# Altium PCB TEENSY 3-4.PcbDoc
Units mil, origin at the board's own origin, x right, y up, seen from the top; angles counter-clockwise.
Board outline 4500 x 5000 mil, 2 copper layers (Top Layer, Bottom Layer); 13 components, 27 nets, 152 pads, 0 vias.
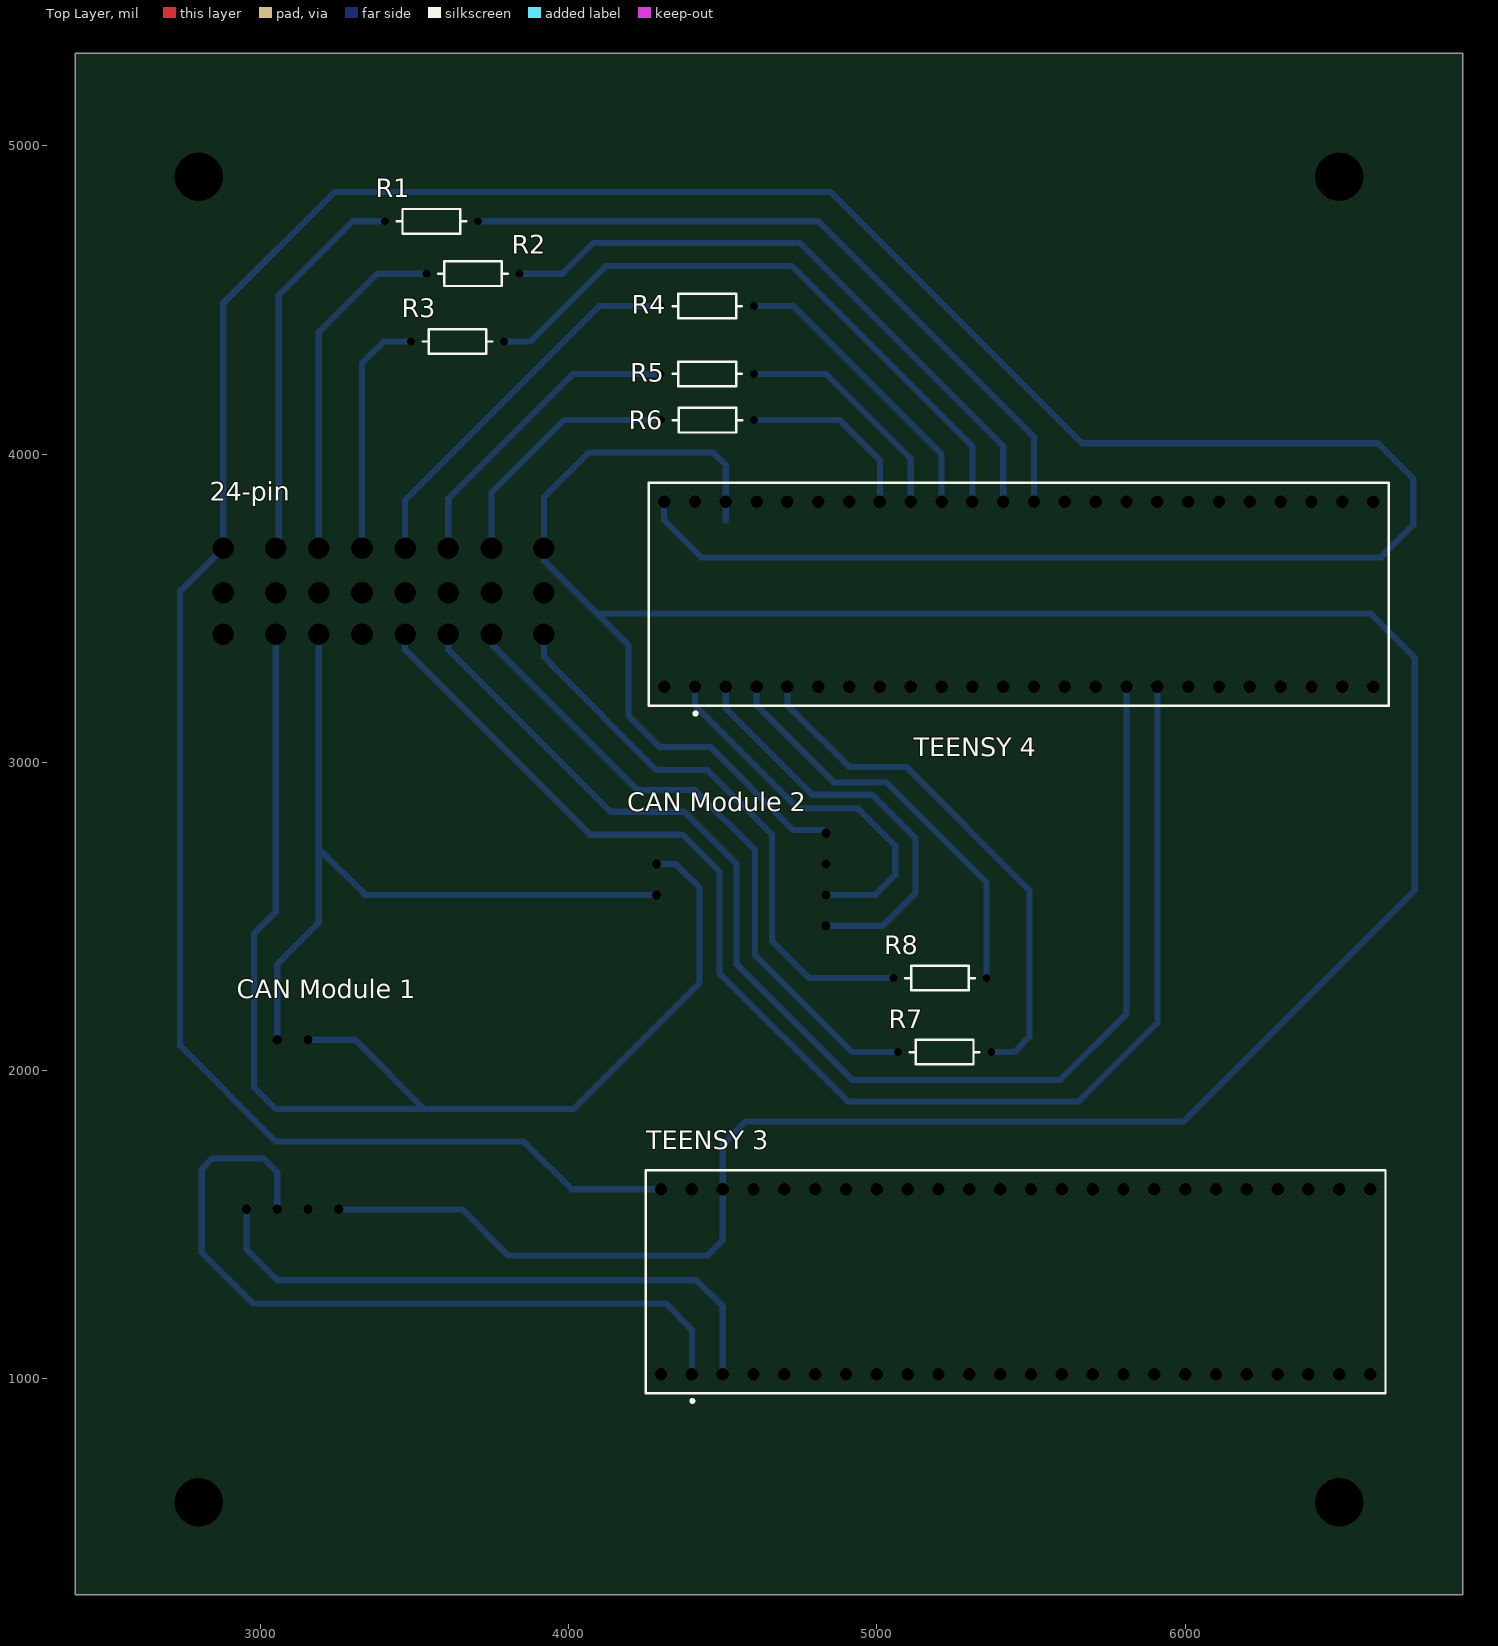
[diagram p0: Top Layer view]
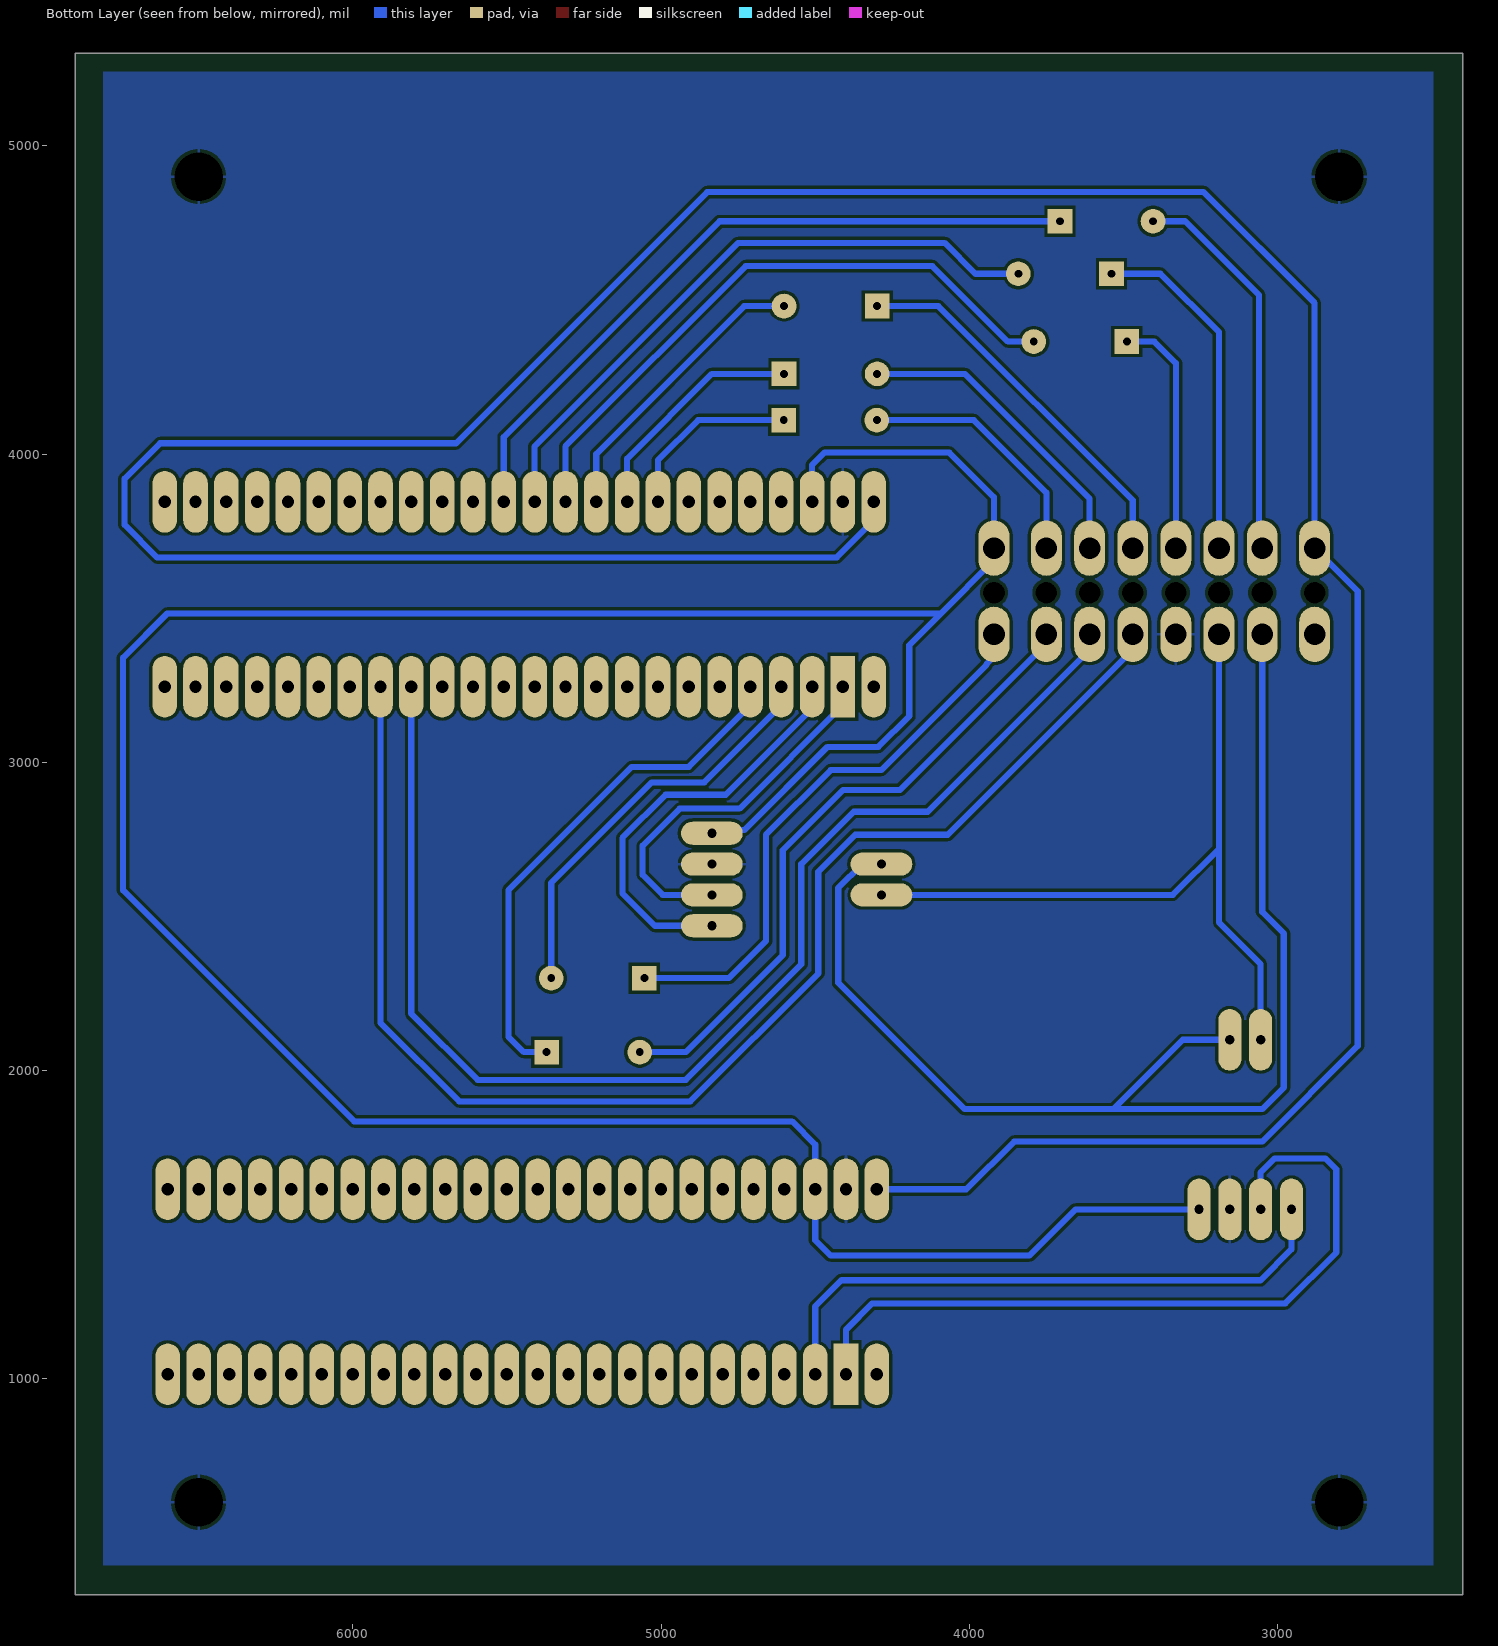
[diagram p1: Bottom Layer view, seen from below]
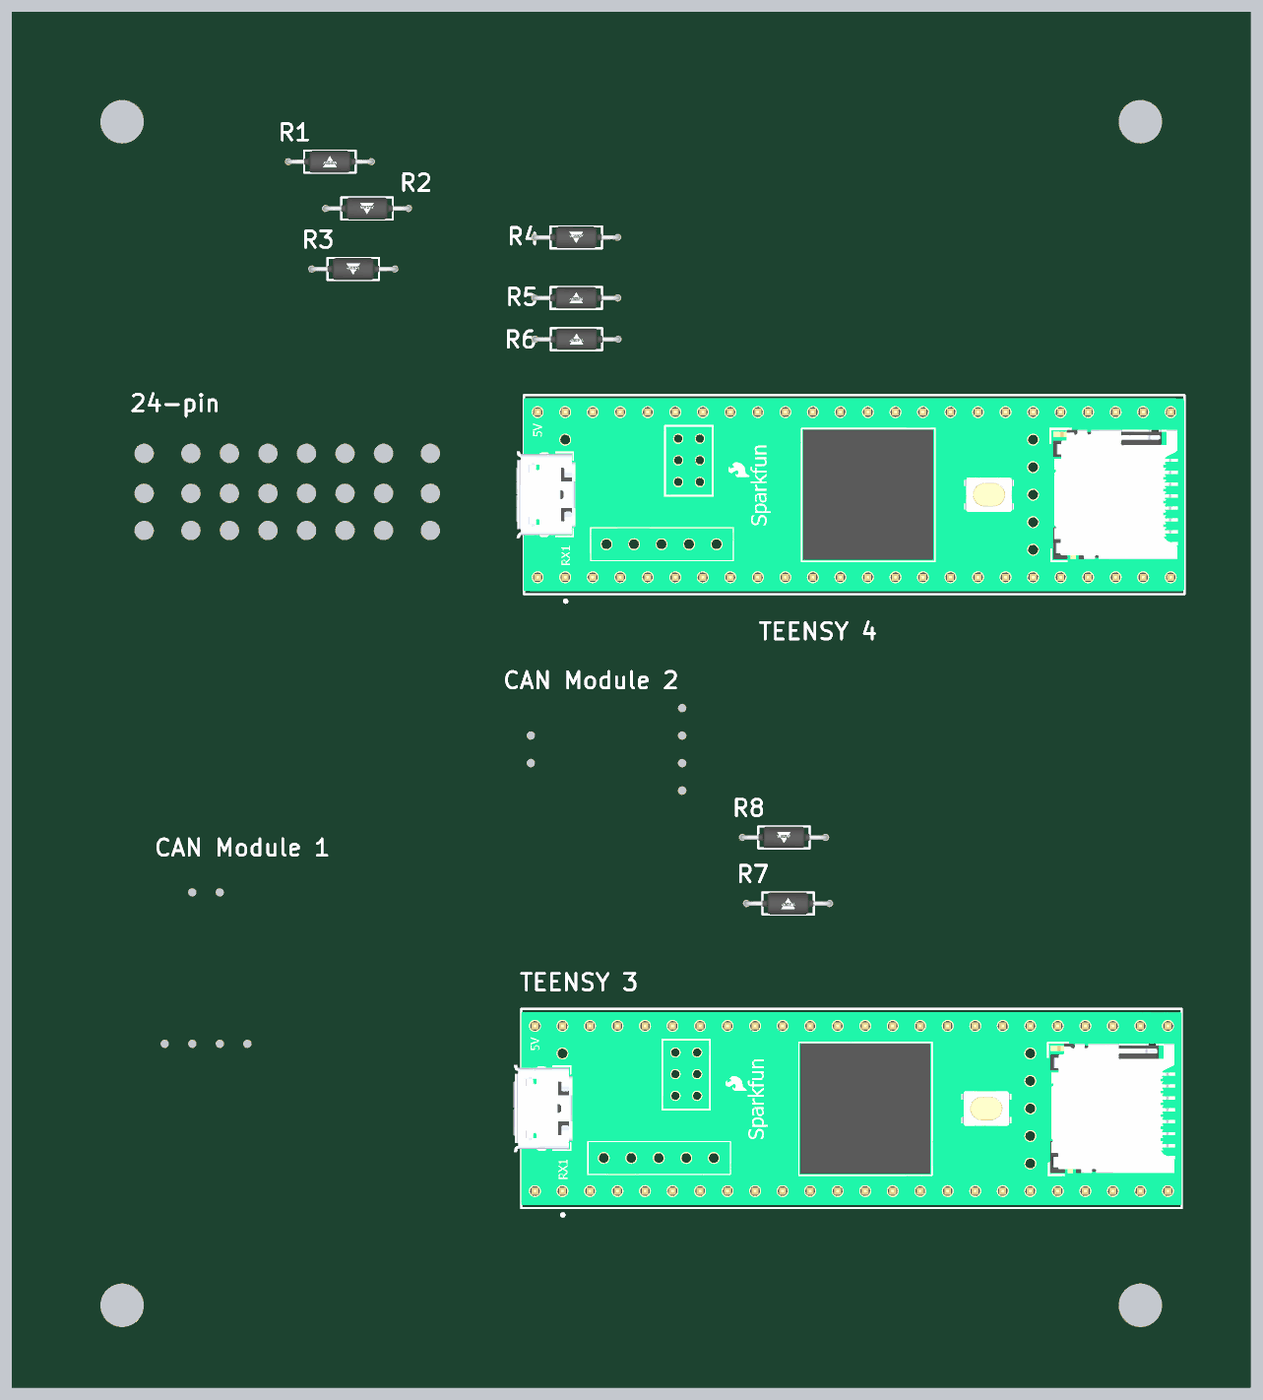
[diagram p2: 3D render of the assembled board from above, using the file's embedded part models]

## Layer stack, top to bottom
Top Solder: solder mask 0.4, Solder Resist, Dk 3.5
Top Layer: signal copper 1.4
Dielectric 1: dielectric 12.6, FR-4, Dk 4.8
Bottom Layer: signal copper 1.4
Bottom Solder: solder mask 0.4, Solder Resist, Dk 3.5

## Board outline
6900,300 2400,300 2400,5300 6900,5300

## Design rules (kind name [scope] priority, off if disabled: settings)
Clearance [All] p1: gap=10 ignorepadtopadclearanceinfootprint=FALSE
PolygonConnect [All] p1: connectstyle=Relief reliefconductorwidth=10 reliefentries=4 polygonreliefangle="90 Angle" airgapwidth=10
RoutingVias [All] p1: holewidth=28 width=50 viastyle="Through Hole" minholewidth=28 minwidth=50 maxholewidth=28 maxwidth=50
SolderMaskExpansion [All] p1: expansion=4 istentingtop=FALSE
Width [All] p1: maxlimit=50 minlimit=20 preferedwidth=20 minimp=50.000000 maximp=50.000000 favimp=50.000000
30 further rules are at their usual default settings.

## Classes and differential pairs
component class "TEENSY 3-4": 24-pin "CAN Module 2" R1 R2 R3 R4 R5 R6 R7 R8 "TEENSY 3" "TEENSY 4"

## Components (designator, comment, footprint, x,y, rotation, side; value= is the part's Value field where it differs from the comment)
24-pin "DJ7242" DJ7242-Footprint-1 2880,3340 r0 top
"CAN Module 1" "CAN Module" "CAN Module-Footprint-1" 3255,1550 r90 top
"CAN Module 2" "CAN Module" "CAN Module-Footprint-1" 4835,2770 r180 top
R1 "CMF5073K200FHEB" FP-CMF50-0 3555,4755 r180 top
R2 "CMF5073K200FHEB" FP-CMF50-0 3690,4585 r0 top
R3 "CMF5073K200FHEB" FP-CMF50-0 3640,4365 r0 top
R4 "CMF5073K200FHEB" FP-CMF50-0 4450,4480 r0 top
R5 "CMF5073K200FHEB" FP-CMF50-0 4450,4260 r180 top
R6 "CMF5073K200FHEB" FP-CMF50-0 4450.98,4110 r180 top
R7 "CMF5073K200FHEB" FP-CMF50-0 5220,2060 r180 top
R8 "CMF5073K200FHEB" FP-CMF50-0 5205,2300 r0 top
"TEENSY 3" "TEENSY 4.1" FP-DEV-16996-MFG 5450,1315 r0 top
"TEENSY 4" "TEENSY 4.1" FP-DEV-16996-MFG 5460,3545 r0 top

## Footprints (in the part's own frame and the unit in brackets; to place one, negate y for a bottom-side part, rotate by r counter-clockwise, add the part's x,y. Pads: shape width x height; smd on the part's side, far side on the other; paste and mask are expansions set on the pad)
"CAN Module-Footprint-1" [mil]
  round 0 / inner round 60 / far side oval 200x75 hole 30: 1(0,300) 2(0,200) 3(0,100) 4(0,0) 5(550,200) 6(550,100)
DJ7242-Footprint-1 [mil]
  round 0 / inner round 60 / far side oval 100x180 hole 70: 1(0,355) 2(170,355) 3(310,355) 4(450,355) 5(590,355) 6(730,355) 7(870,355) 8(1040,355) 17(0,75) 18(170,75) 19(310,75) 20(450,75) 21(590,75) 22(730,75) 23(870,75) 24(1040,75)
  round 0 hole 70: 9(0,210) 10(170,210) 11(310,210) 12(450,210)
  round 0 / inner oval 100x200 / far side round 0 hole 70: 13(590,210) 14(730,210) 15(870,210) 16(1040,210)
FP-CMF50-0 [mm]
  rect 0x0 / inner rect 1.15x1.15 / far side rect 2.032x2.032 hole 0.65 paste-2539.97 mask+0: 1(-3.835,0)
  round 0 / inner round 1.15 / far side round 2.032 hole 0.65 paste-2539.97 mask+0: 2(3.835,0)
  silkscreen extent -2.86,-1.01 2.86,1.01, body extent -4.51,-1.11 4.51,1.11, height 0.25
FP-DEV-16996-MFG [mm]
  rect 0x0 / inner rect 1.57x1.57 / far side rect 2.032x5.08 hole 1.02 paste-2539.97 mask+0: 0(-26.67,-7.62)
  round 0 / inner round 1.57 / far side oval 2.032x5.08 hole 1.02 paste-2539.97 mask+0: 1(-24.13,-7.62) 2(-21.59,-7.62) 3(-19.05,-7.62) 4(-16.51,-7.62) 5(-13.97,-7.62) 6(-11.43,-7.62) 7(-8.89,-7.62) 8(-6.35,-7.62) 9(-3.81,-7.62) 10(-1.27,-7.62) 11(1.27,-7.62) 12(3.81,-7.62) 13(3.81,7.62) 14(1.27,7.62) 15(-1.27,7.62) 16(-3.81,7.62) 17(-6.35,7.62) 18(-8.89,7.62) 19(-11.43,7.62) 20(-13.97,7.62) 21(-16.51,7.62) 22(-19.05,7.62) 23(-21.59,7.62) 24(8.89,-7.62) 25(11.43,-7.62) 26(13.97,-7.62) 27(16.51,-7.62) 28(19.05,-7.62) 29(21.59,-7.62) 30(24.13,-7.62) 31(26.67,-7.62) 32(29.21,-7.62) 33(29.21,7.62) 34(26.67,7.62) 35(24.13,7.62) 36(21.59,7.62) 37(19.05,7.62) 38(16.51,7.62) 39(13.97,7.62) 40(11.43,7.62) 41(8.89,7.62) 42(-29.21,7.62) 43(-26.67,7.62) 44(-24.13,7.62) 45(6.35,7.62) 46(-29.21,-7.62) 47(6.35,-7.62)
  silkscreen extent -30.48,-9.94 30.48,9.19, body extent -30.58,-9.29 30.58,9.29, height 0.25

## Part data
24-pin: library part CMP-00030-00002-5, "24-pin connector"
"CAN Module 1" "CAN Module 2": library part CMP-00030-00003-1, "CAN waveshare"
R1 R2 R3 R4 R5 R6 R7 R8: library part CMP-00030-44386654-1, "CMF5073K200FHEB Res Metal Film 73.2K Ohm 1% 0.125W(1/8W) ±50ppm/°C Epoxy AXL T/R", Case/Package=Axial, Max Operating Temperature=175°C, Max Power Dissipation=250mW, Min Operating Temperature=-55°C, Power Rating=125mW, Resistance=73.2kΩ, Temperature Coefficient=50ppm/°C, Tolerance=1%, Voltage Rating=200V, Composition="Metal Film", Diameter=1.65mm, Features="Flame Retardant Coating, Moisture Resistant", Lead Free="Lead Free", Length=3.81mm, Mount="Through Hole", NexarPartId=44386654, Number of Terminations=2, Packaging="Cut Tape", RoHS=Compliant, Schedule B="8533210090, 8533210090", Termination=Axial, Voltage Rating (DC)=200V, Width=1.65mm
"TEENSY 3" "TEENSY 4": library part CMP-157412-000001-1, "TEENSY 4.1 (HEADERS)"

## Free pads (board coordinates)
  round 40 / inner round 0 / far side round 40 hole 157.48: 2(2800,600) 2(2800,4900) 2(6500,600) 2(6500,4900)

## Nets (pads, with @x,y where several pads share a name; then routed paths per layer and width w, separated by ;. In a path a pad name is that pad's centre, name@x,y a point inside that pad or via, vN(x,y) a via of type N, cw(c..) or ccw(c..) an arc to the next point about the centre after c; other vN are vias at no path point)
3.3V: 24-pin.8 "CAN Module 1.4" "CAN Module 2.4" "TEENSY 3.44" "TEENSY 4.44" | length 10159
  Bottom Layer w20: 3255,1550 3655,1550 3805,1400 4450,1400 4500,1450 4500,1615 4500,1760 4575,1835 5995,1835 6745,2585 6745,3340 6602.5,3482.5 4092.5,3482.5 ; 4510,3785 4510,3965 4470,4005 4065,4005 3920,3860 24-pin.8 3920,3655 4092.5,3482.5 ; 4835,2770 4824.48,2780.52 4729.48,2780.52 4460,3050 4295,3050 4195,3150 4195,3380 4092.5,3482.5
"CAN RX 1": "CAN Module 1.2" "TEENSY 3.0" | length 2506.7
  Bottom Layer w20: 3055,1550 3055,1670 3010,1715 2845,1715 2810,1680 2810,1410 2975,1245 4315,1245 4400,1160 4400,1015
"CAN RX 2": "CAN Module 2.2" "TEENSY 4.0" | length 1245.4
  Bottom Layer w20: 4410,3245 4410,3185 4745,2850 4940,2850 5060,2730 5060,2635 4995,2570 4835,2570
"CAN TX 1": "CAN Module 1.1" "TEENSY 3.1" | length 1971.6
  Bottom Layer w20: 2955,1550 2955,1420 3055,1320 4415,1320 4500,1235 4500,1015
"CAN TX 2": "CAN Module 2.1" "TEENSY 4.1" | length 1372.5
  Bottom Layer w20: 4510,3245 4510,3175 4790,2895 4985,2895 5125,2755 5125,2575 5020,2470 4835,2470
CANH: 24-pin.19 "CAN Module 1.5" "CAN Module 2.5" | length 2528.1
  Bottom Layer w20: 3055,2100 3055,2345 3190,2480 3190,2720 ; 24-pin.19 3190,2720 ; 4285,2570 3340,2570 3190,2720
CANL: 24-pin.18 "CAN Module 1.6" "CAN Module 2.6" | length 4093.1
  Bottom Layer w20: 24-pin.18 3050,2515 2980,2445 2980,1945 3050,1875 3532.5,1875 ; 3155,2100 3307.5,2100 3532.5,1875 ; 4285,2670 4347.5,2670 4425,2592.5 4425,2285 4015,1875 3532.5,1875
GND: 24-pin.20 "CAN Module 1.3" "CAN Module 2.3" "TEENSY 3.43" "TEENSY 4.43" pad.2
"HRN RD": 24-pin.24 R8.1 | length 1841.9
  Bottom Layer w20: 24-pin.24 3920,3343.35 3944.07,3319.28 3944.07,3315.93 4285,2975 4450,2975 4660,2765 4660,2420 4780,2300 R8.1
"HRN WRT": 24-pin.23 R7.2 | length 2097
  Bottom Layer w20: 24-pin.23 3750,3385 4225,2910 4410,2910 4605,2715 4605,2375 4920,2060 R7.2
"LED1 B": 24-pin.4 R3.1 | length 788
  Bottom Layer w20: 24-pin.4 3330,4295 3400,4365 R3.1
"LED1 G": 24-pin.3 R2.1 | length 1127.7
  Bottom Layer w20: 24-pin.3 3190,4395 3380,4585 R2.1
"LED1 R": 24-pin.2 R1.2 | length 1267.6
  Bottom Layer w20: 24-pin.2 3060,3705 3060,4515 3300,4755 R1.2
"LED2 B": 24-pin.7 R6.2 | length 827.3
  Bottom Layer w20: 24-pin.7 3750,3875 3985,4110 R6.2
"LED2 G": 24-pin.6 R5.2 | length 1016.8
  Bottom Layer w20: 24-pin.6 3610,3855 4015,4260 R5.2
"LED2 R": 24-pin.5 R4.1 | length 1245
  Bottom Layer w20: 24-pin.5 3470,3850 4100,4480 R4.1
NetR1_1: "TEENSY 4.14" R1.1 | length 2304
  Bottom Layer w20: R1.1 4810,4755 5510,4055 5510,3845
NetR2_2: "TEENSY 4.15" R2.2 | length 2063.8
  Bottom Layer w20: R2.2 3980,4585 4080,4685 4750,4685 5410,4025 5410,3845
NetR3_2: "TEENSY 4.16" R3.2 | length 2042.8
  Bottom Layer w20: R3.2 3875,4365 4120,4610 4725,4610 5310,4025 5310,3845
NetR4_2: "TEENSY 4.17" R4.2 | length 962.8
  Bottom Layer w20: R4.2 4730,4480 5210,4000 5210,3845
NetR5_1: "TEENSY 4.18" R5.1 | length 762.9
  Bottom Layer w20: R5.1 4835,4260 5110,3985 5110,3845
NetR6_1: "TEENSY 4.19" R6.1 | length 596.9
  Bottom Layer w20: R6.1 4880,4110 5010,3980 5010,3845
NetR7_1: "TEENSY 4.3" R7.1 | length 1713.3
  Bottom Layer w20: 4710,3245 4710,3185 4910,2985 5095,2985 5495,2585 5495,2110 5445,2060 R7.1
NetR8_2: "TEENSY 4.2" R8.2 | length 1353.6
  Bottom Layer w20: 4610,3245 4610,3185 4860,2935 5030,2935 5355.98,2609.02 R8.2
SCL: 24-pin.22 "TEENSY 4.24" | length 4167.3
  Bottom Layer w20: 24-pin.22 3610,3365 4135,2840 4375,2840 4545,2670 4545,2345 4920,1970 5595,1970 5810,2185 5810,3245
SDA: 24-pin.21 "TEENSY 4.25" | length 4485.8
  Bottom Layer w20: 24-pin.21 3470,3365 4070,2765 4370,2765 4490,2645 4490,2315 4905,1900 5655,1900 5910,2155 5910,3245
VIN: 24-pin.1 "TEENSY 3.42" "TEENSY 4.42" | length 11348.1
  Bottom Layer w20: 4300,1615 4010,1615 3855,1770 3050,1770 2740,2080 2740,3555 24-pin.1 2880,4490 3240,4850 4850,4850 5665,4035 6625,4035 6740,3920 6740,3770 6635,3665 4430,3665 4310,3785 4310,3845
pads on no net: 24-pin.9 24-pin.10 24-pin.11 24-pin.12 24-pin.13 24-pin.14 24-pin.15 24-pin.16 24-pin.17 "TEENSY 3.2" "TEENSY 3.3" "TEENSY 3.4" "TEENSY 3.5" "TEENSY 3.6" "TEENSY 3.7" "TEENSY 3.8" "TEENSY 3.9" "TEENSY 3.10" "TEENSY 3.11" "TEENSY 3.12" "TEENSY 3.13" "TEENSY 3.14" "TEENSY 3.15" "TEENSY 3.16" "TEENSY 3.17" "TEENSY 3.18" "TEENSY 3.19" "TEENSY 3.20" "TEENSY 3.21" "TEENSY 3.22" "TEENSY 3.23" "TEENSY 3.24" "TEENSY 3.25" "TEENSY 3.26" "TEENSY 3.27" "TEENSY 3.28" "TEENSY 3.29" "TEENSY 3.30" "TEENSY 3.31" "TEENSY 3.32" "TEENSY 3.33" "TEENSY 3.34" "TEENSY 3.35" "TEENSY 3.36" "TEENSY 3.37" "TEENSY 3.38" "TEENSY 3.39" "TEENSY 3.40" "TEENSY 3.41" "TEENSY 3.45" "TEENSY 3.46" "TEENSY 3.47" "TEENSY 4.4" "TEENSY 4.5" "TEENSY 4.6" "TEENSY 4.7" "TEENSY 4.8" "TEENSY 4.9" "TEENSY 4.10" "TEENSY 4.11" "TEENSY 4.12" "TEENSY 4.13" "TEENSY 4.20" "TEENSY 4.21" "TEENSY 4.22" "TEENSY 4.23" "TEENSY 4.26" "TEENSY 4.27" "TEENSY 4.28" "TEENSY 4.29" "TEENSY 4.30" "TEENSY 4.31" "TEENSY 4.32" "TEENSY 4.33" "TEENSY 4.34" "TEENSY 4.35" "TEENSY 4.36" "TEENSY 4.37" "TEENSY 4.38" "TEENSY 4.39" "TEENSY 4.40" "TEENSY 4.41" "TEENSY 4.45" "TEENSY 4.46" "TEENSY 4.47"

## Polygon pours and split planes (outlines as drawn)
GND on Bottom Layer "GND_L02_P000" (solid, pour order 0): 2495,5240 6810,5240 6810,395 2495,395